# Altium PCB PCB1-C.PcbDoc (part 4 of 4)
Units mil, origin at the board's own origin, x right, y up, seen from the top; angles counter-clockwise.
Board outline 2476.38 x 3779.53 mil, 2 copper layers (Top Layer, Bottom Layer); 106 components, 105 nets, 404 pads, 256 vias.
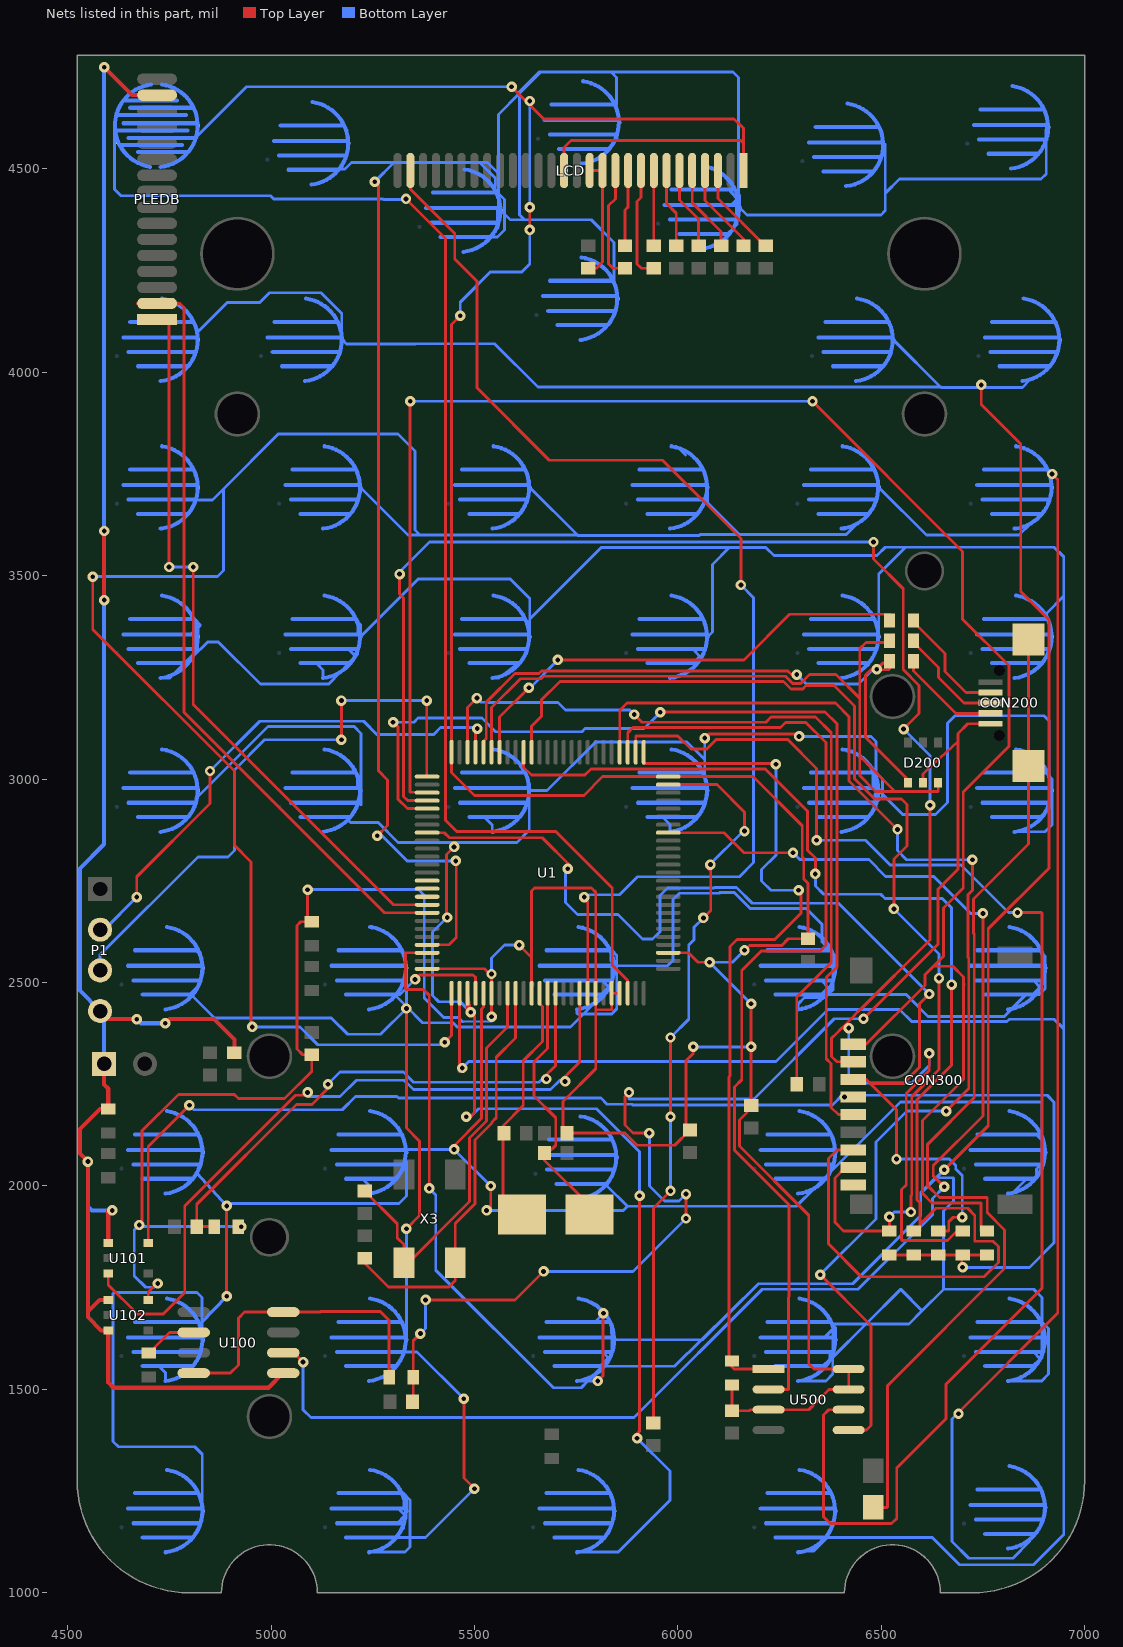
[diagram p4: the nets of this part, all layers, seen from the top]

## Via types
v1: diameter 25.59, hole 11.81, Top Layer to Bottom Layer, tented both sides, 253 vias
v2: diameter 39.37, hole 39.37, Top Layer to Bottom Layer, tented both sides, 2 vias
v3: diameter 25.59, hole 11.81, Top Layer to Bottom Layer, 1 vias

## Nets (pads, with @x,y where several pads share a name; then routed paths per layer and width w, separated by ;. In a path a pad name is that pad's centre, name@x,y a point inside that pad or via, vN(x,y) a via of type N, cw(c..) or ccw(c..) an arc to the next point about the centre after c; other vN are vias at no path point) (continued)
KO_0: KEY1.1 KEY2.1 KEY3.1 KEY4.1 KEY5.1 KEY6.1 KEY7.1 U1.97 | length 9341.4
  Top Layer w7: v1(5255,4468.5) 5264,4459.5 5264,3020.59 5286.59,2998 5286.59,2886.41 v1(5261.25,2861.06) ; U1.97@5383.74,2592.83 5437.5,2592.83 5455.34,2610.68 5455.34,2797.81 v1(5454,2799.16)
  Bottom Layer w7: 5160,4500 5167.9,4500 5182.01,4500 5198.01,4516 5302.5,4516 ; v1(5255,4468.5) 5302.5,4516 ; v1(5261.25,2861.06) 5272.97,2861.06 5334.87,2799.16 v1(5454,2799.16) ; 5381.04,4403.64 5556,4403.64 5557,4402.64 5557,4389.6 ; 5394.04,4367.64 5556,4367.64 5557,4368.64 ; 5398.04,4441.64 5540.36,4441.64 5551.04,4441.64 ; 5417.04,4332.64 5536.04,4332.64 ; 5557,4361.25 5557,4367.64 5557,4368.64 ; 5558.04,4367.64 5558.04,4364.09 5558.04,4354.64 5550.02,4346.62 5536.04,4332.64 ; 5668.44,4187.1 5837.5,4187.1 ; 5672.38,4620.17 5844,4620.17 ; 5681.44,4151.1 5837.5,4151.1 ; 5685.38,4584.17 5844,4584.17 ; 5685.44,4225.1 5838.44,4225.1 ; 5689.38,4658.17 5842.38,4658.17 ; 5704.44,4116.1 5823.44,4116.1 ; 5760.48,4079.72 5760.48,4080 5762.71,4080 ; 5827.38,4549.17 5841.36,4563.16 5850.38,4572.17 5850.38,4583.64 ; 5843,4225.1 5843,4319 ; 5843.47,4225.1 5843,4319 ; 5849.38,4658.17 5849.38,4725 5836.38,4738 ; 5967.65,4411.51 6131,4411.51 6144.65,4425.17 ; 5980.65,4375.51 6137.5,4375.51 6144.65,4375.51 ; 5984.65,4449.51 6125,4449.51 6144.65,4427.99 ; 6122.65,4340.51 6136.64,4354.5 6145.65,4363.51 6145.65,4374.98 6145.65,4375.51 ; 6137.65,4449.51 6142.71,4444.46 6144.65,4442.51 ; 6145.65,4411.51 6145.65,4375.51 ; 6321.98,4565.06 6489.94,4565.06 ; 6334.98,4529.06 6484.06,4529.06 ; 6338.98,4603.06 6491.98,4603.06 ; 6357.98,4494.06 6400,4494.06 6476.56,4494.06 ; 6504.53,4565.06 6510,4559.58 6510,4440 ; 6882.5,4537.36 6886.75,4537.36 ; 6897.5,4646.36 6900,4646.36 6900.59,4645.77 ; 6904.5,4572.36 6904.5,4595.36 6905.5,4596.36 6905.5,4602.87 ; 6905.5,4571.83 6905.5,4487.5 6893,4475 6545,4475 6510,4440 ; 6905.5,4608.36 6905.5,4602.87 ; KEY7.1@6911.5,4602.36 6910.2,4601.06 6908.75,4599.61 6905.5,4602.87 ; 5302.5,4516 5512.5,4516 ; 5512.5,4516 5551.04,4477.46 5551.04,4447.13 5551.04,4441.64 ; 5512.5,4516 5532,4516 5559.04,4488.96 ; 5536.04,4332.64 5540.3,4332.64 5556.64,4332.64 5574,4350 5574,4388.68 ; 5551.04,4441.64 5553.86,4441.64 5557.36,4441.64 5559.04,4439.96 ; 5557,4368.64 5557,4389.6 ; 5557,4389.6 5563.74,4396.34 KEY2.1@5565.04,4397.64 ; 5559.04,4403.64 5561,4403.64 5561,4401.68 ; 5559.04,4403.64 5559.04,4402.68 5560,4402.68 ; 5559.04,4403.64 5560,4402.68 ; 5559.04,4403.64 5559.04,4428.44 5559.04,4439.96 ; 5559.04,4439.96 5559.04,4488.96 ; 5559.04,4439.96 5574,4425 5574,4388.68 ; 5559.04,4488.96 5559.04,4634.04 5611,4686 ; 5560,4402.68 5561,4401.68 ; 5561,4401.68 KEY2.1@5563.68,4399 ; KEY2.1@5563.68,4399 5563.74,4399 5565.04,4399 KEY2.1@5565.04,4398.93 ; KEY2.1@5563.68,4399 KEY2.1@5563.75,4398.93 ; KEY2.1@5563.75,4398.93 KEY2.1@5565.04,4397.64 ; KEY2.1@5563.75,4398.93 KEY2.1@5565.04,4398.93 ; KEY2.1@5565.04,4397.64 5574,4388.68 ; KEY2.1@5565.04,4397.64 KEY2.1@5565.04,4398.93 ; 5574,4388.68 5587.35,4375.33 5623.31,4375.19 ; 5611,4686 5611,4387.5 5623.31,4375.19 ; 5611,4686 5611,4690 5659,4738 5663,4738 ; 5611,4686 5663,4738 ; 5623.31,4375.19 5673.74,4375 ; 5623.31,4375.19 5623.5,4375 5673.74,4375 ; 5663,4738 5836.38,4738 ; 5673.74,4375 5787,4375 5843,4319 ; 5836.38,4738 6136,4738 6149,4725 6149,4438.17 ; 6144.65,4375.51 6145.65,4375.51 ; 6144.65,4375.51 6144.65,4411.51 6144.65,4425.17 ; 6144.65,4425.17 6144.65,4427.99 ; 6144.65,4425.17 6146,4426.51 6144.65,4427.99 ; 6144.65,4427.99 6144.65,4439.33 6144.65,4442.51 ; 6144.65,4442.51 6149,4438.17 ; 6145.65,4375.51 6145.82,4375.51 6148,4375.51 6149,4376.51 6149,4389 6149,4422.3 6149,4438.17 ; 6149,4438.17 6151.65,4435.51 KEY5.1@6151.65,4405.51 6170.12,4387.05 6499.3,4387.05 6510,4397.74 6510,4440
KO_1: KEY8.1 KEY9.1 KEY10.1 KEY11.1 KEY12.1 KEY13.1 KEY14.1 U1.98 | length 12562.7
  Top Layer w7: U1.98@5383.74,2573.15 5332,2573.15 5331,2572.15 5331,2484 5332,2483 5375,2483 5389,2469 v1(5389,1994) ; v1(5803,1520.62) 5816,1533.62 5816.5,1686.5 v1(5817,1687) ; v1(6655,2040) 6763.01,2148.01 6763.01,2632.09 6912,2781.08 6912,3392 6843,3461 6843,3824 6746,3921 v1(6746,3969)
  Bottom Layer w7: 4821,4100.54 4892.46,4172 4972.3,4172 4996,4195.7 5123.3,4195.7 5174,4145 5174,4100 ; 4991.28,4086 5168.28,4086 ; 5083.32,3978.62 5093,3981 ; KEY9.1@5175.28,4080 5185.28,4070 5355.47,4070 5355.77,4070.3 5549.7,4070.3 5656,3964 6512.5,3964 6512.56,3964.06 6645.54,3964.06 ; v1(5389,1994) 5405,1978 5405,1793 5694,1504 5762.5,1504 5779.12,1520.62 ; 5660.5,1628 5827.5,1628 5837.5,1628 ; 5673.5,1592 5816,1592 5829,1577 5809,1557 5696.5,1557 ; 5677.5,1666 5796,1666 v1(5817,1687) ; 5752.55,1520.62 5779.12,1520.62 ; v1(5803,1520.62) 5779.12,1520.62 ; 5830.5,1666 5835.55,1660.95 ; 5837.5,1592 5837.5,1628 ; 6203.9,1628 6361,1628 6380.9,1647.9 ; 6216.9,1592 6366.5,1592 6373,1592 6374,1591 6374,1575 6356,1557 6275.5,1557 6239.9,1557 ; 6220.9,1666 6373.9,1666 ; 6295.95,1520.62 6364.12,1520.62 6381,1537.5 6381,1579.1 ; 6358.9,1557 6372.89,1570.99 6381,1579.1 ; 6380.9,1592 6380.9,1628 6380.9,1647.9 ; 6381.9,1628 6381,1628 6381,1588.74 6381,1579.1 ; KEY13.1@6387.9,1622 6387.9,1652 6381.05,1658.85 ; KEY10.1@6529.61,4080 6645.54,3964.06 ; 6646.61,3964.06 6645.54,3964.06 ; v1(6655,2040) 6635.3,2020.3 ; 6719.6,1628 6887.5,1628 6895,1628 ; 6732.6,1592 6875,1592 6890,1575 6872,1557 6755.6,1557 ; 6736.6,1666 6889.6,1666 ; v1(6746,3969) v1@6746,3963 ; 6755.06,4086 6925,4086 ; 6768.06,4050 6925.5,4050 ; 6772.06,4124 6925.06,4124 ; 6791.06,4015 6832.1,4015 6875,4015 ; 6811.64,1520.62 6811,1520.62 6811,1521 6814.6,1521 6894.5,1521 6911,1537.5 6911,1650 6895,1666 ; 6865.49,3982.44 6847,3963 v1@6746,3963 ; 6874.6,1557 6888.59,1570.99 6895,1577.4 6895,1584.18 6895,1592 6895,1628 ; 6896.6,1592 6896.6,1628 ; KEY14.1@6903.6,1622 6902.31,1623.29 6897.6,1628 ; 5779.12,1520.62 5792.2,1533.7 5815.5,1557 5819.76,1557 5992,1557 6058.12,1622 ; 5835.55,1660.95 5835.55,1661 5837,1661 5837,1659.5 ; 5835.55,1660.95 5837,1659.5 ; 5837,1659.5 5837.5,1659 5837.5,1655.82 5837.5,1637 ; 5837,1659.5 5837,1657.22 5837,1637.5 5837.5,1637 ; 5837.5,1628 5838.5,1628 5843.21,1623.29 KEY12.1@5844.5,1622 6058.12,1622 ; 5837.5,1628 5837.5,1637 ; 6058.12,1622 6060.5,1622 6198.2,1759.7 ; 6058.12,1622 6198.2,1759.7 ; 6198.2,1759.7 6429.82,1759.7 6597.3,1927.18 6597.3,1982.3 ; 6373.9,1666 6375,1666 6378.64,1661.7 6379.23,1661 ; 6373.9,1666 6378.95,1660.95 ; 6378.95,1660.95 6380.9,1659 ; 6378.95,1660.95 6378.95,1661 6379.23,1661 ; 6379.23,1661 6462.9,1661 ; 6379.23,1661 6381.05,1658.85 ; 6380.9,1647.9 6380.9,1655.82 6380.9,1659 ; 6380.9,1647.9 6382.8,1649.8 6386,1653 6381.05,1658.85 ; 6380.9,1659 6381.05,1658.85 ; 6381,1579.1 6462.9,1661 ; 6462.9,1661 6568,1661 6600.45,1693.45 ; 6462.9,1661 6547.9,1746 6600.45,1693.45 ; 6597.3,1982.3 6597.3,1983.59 6634,2020.3 6635.3,2020.3 ; 6597.3,1982.3 6635.3,2020.3 ; 6600.45,1693.45 6652.7,1745.7 ; 6635.3,2020.3 6676,2020.3 6677.3,2019 6677.3,1963.2 6652.7,1938.61 6652.7,1745.7 ; 6645.54,3964.06 6646.61,3963 v1@6746,3963 ; 6652.7,1745.7 6875,1746 6895,1726 6895,1666 ; 6889.6,1666 6894.65,1660.95 ; 6889.6,1666 6892.42,1666 6895,1666 ; 6894.65,1660.95 6894.65,1661 6895,1661 ; 6894.65,1660.95 6895,1660.6 ; 6895,1628 6896.6,1628 ; 6895,1628 6895,1660.09 6895,1660.6 ; 6895,1660.6 6895,1661 ; 6895,1660.6 6896.6,1659 6896.6,1655.82 6896.6,1628 ; 6895,1661 6895,1666 ; 6895,1661 6897.6,1661 6897.6,1652.81 6897.6,1628 ; 6896.6,1628 6897.6,1628
KO_2: KEY15.1 KEY16.1 KEY17.1 KEY18.1 KEY19.1 KEY20.1 KEY21.1 U1.1 | length 11604.8
  Top Layer w7: v1(4562,3497.72) 4562,3368 4910.2,3019.8 4910.2,2837.5 4951,2796.7 4951,2394 v1(4954,2391) ; v1(5427.23,2353.5) 5443.78,2370.05 U1.1@5443.78,2473.74 ; v1(6690,1440) 6690,1443.5 6934,1687.5 6934,3736.5 6933.5,3736.5 v1(6920,3750)
  Bottom Layer w7: v1(4562,3497.72) 4868.72,3497.72 4883.5,3512.5 4883.5,3713.5 ; 4637,3723 4811,3723 ; 4650,3687 4787.5,3687 ; 4654,3761 4800,3761 ; 4673,3652 4714.5,3652 4792,3652 ; 4729,3615.62 4729,3616 4732,3616 ; 4813.5,3686.5 4815.01,3686.5 4856.5,3686.5 4883.5,3713.5 ; v1(4954,2391) 5071,2391 5115,2347 5420.73,2347 v1(5427.23,2353.5) ; 5036,3723 5200,3723 ; 5049,3687 5194.5,3687 ; 5053,3761 5206,3761 ; 5072,3652 5191,3652 ; KEY16.1@5218,3719 5218.71,3718.29 KEY16.1@5220,3717 5337,3600 5366.5,3600 ; 5452,3723 5629,3723 ; 5465,3687 5612.5,3687 ; 5469,3761 5622,3761 ; 5488,3652 5587,3652 ; 5625,3761 5624.82,3761 5622,3761 ; 5627.05,3755.95 5622,3761 ; 5632.27,3720.73 5634.71,3718.29 KEY17.1@5636,3717 5753,3600 ; 5754,3600 5753,3600 ; 5889,3723 6050,3723 ; 5902,3687 6054,3687 ; 5906,3761 6059,3761 ; 5925,3652 6012.5,3652 ; 5984.18,3818.24 6003,3812.5 6018.5,3797 ; KEY18.1@6073,3717 6073,3680 6152,3601 ; 6310,3723 6475,3723 ; 6323,3687 6462.5,3687 ; 6327,3761 6457,3761 ; 6346,3652 6447,3652 ; 6402.04,3615.62 6407.07,3616.32 ; 6441.7,3628.7 6414,3601 6152,3601 ; KEY19.1@6494,3717 6611,3600 6839,3600 6867.7,3628.7 6874.5,3635.5 ; v1@6686.5,1440 6674,1427.5 6674,1126 6715,1085 6823.6,1085 6864.3,1125.7 ; 6736,3723 6900,3723 ; 6749,3687 6887.5,3687 ; 6753,3761 6906,3761 ; 4883.5,3713.5 5018,3848 5312.5,3848 5354,3806.5 5354,3612.5 5366.5,3600 ; 5366.5,3600 5753,3600 ; 5753,3600 5754,3599 6053.1,3599 6055.1,3601 6152,3601
KO_3: KEY22.1 KEY23.1 KEY24.1 KEY25.1 KEY26.1 KEY27.1 KEY28.1 U1.2 | length 11750.9
  Top Layer w7: v1@5463.46,2281.54 U1.2@5463.46,2473.74
  Bottom Layer w7: 4637,3356 4803.5,3356 4814,3366.5 ; 4654,3394 4807,3394 ; 4729.05,3248.62 4751,3248.62 4759.25,3256.87 4787.38,3285 4810.82,3308.44 4820,3317.62 4820,3356 4819.54,3356 4815,3356 ; 4792,3285 4805.99,3298.99 4844.5,3337.5 4870.5,3337.5 4974,3234 5142,3234 5170.54,3263.4 5204.85,3298.76 5208,3302 ; 4814,3320 4814,3356 4814,3366.5 ; KEY22.1@4821,3350 4821,3373.5 ; 5049,3320 5190,3320 5207.12,3302.88 5208,3302 ; 5072,3285 5072,3284 5112.5,3284 5128,3268.5 5128,3248.62 ; 5191,3285 5204.99,3298.99 5208,3302 ; 5206,3394 5211.05,3388.95 5214,3386 ; 5209.53,3392.47 5214,3388 5214,3386 ; 5213,3320 5213,3316.45 5213,3307 5208,3302 ; 5214,3356 5214,3380.81 5214,3386 ; 5452,3356 5626,3356 ; v1@5462.5,2282.5 v1(5470,2290) 5486,2306 6241,2306 6369,2434 6545,2434 6575,2404 6809,2404 6815,2410 6925,2410 6948.5,2386.5 ; 5465,3320 5612.5,3320 ; 5469,3394 5616,3394 ; 5488,3285 5590,3285 ; 5544.05,3248.62 5560,3248.62 5567.22,3254.03 5608.5,3285 ; KEY24.1@5636,3350 5636,3394 ; 5889,3356 6054,3356 ; 5902,3320 6037.5,3320 6054,3301.5 6037.5,3285 5965,3285 5925,3285 ; 5906,3394 6059,3394 ; KEY25.1@6073,3350 6085,3362 6085,3528 6126,3569 ; 6203.9,1207 6362.5,1207 ; 6216.9,1171 6370.5,1171 ; 6220.9,1245 6373.9,1245 ; 6239.9,1136 6358.9,1136 ; 6295.94,1099.62 6295.94,1102 6309.14,1102 6333.9,1102 6367.9,1136 ; 6310,3356 6475,3356 ; 6323,3320 6471,3320 6472,3319 ; 6327,3394 6480,3394 ; 6346,3285 6457,3285 ; 6370,1136 6625.5,1136 6692.5,1069 6874,1069 6948.5,1143.5 6948.5,2386.5 ; 6402.04,3248.62 6415,3252 ; KEY26.1@6494,3350 6494,3504 6560,3570 ; 6736,3356 6900,3356 ; 6749,3320 6900,3320 ; 6906,3399.49 6906,3407.5 6948.5,3450 ; 4807,3394 4809.82,3394 4812.5,3394 4826,3378.5 4821,3373.5 ; 4807,3394 4812.05,3388.95 4814,3387 ; 4814,3366.5 4814,3383.82 4814,3387 ; 4814,3366.5 4817.72,3370.22 4821,3373.5 ; 4814,3387 4821,3380 4821,3373.5 ; 5214,3386 5220,3380 KEY23.1@5220,3350 5362,3492 5588,3492 5636,3444 5636,3394 ; 5636,3394 5811,3569 6126,3569 ; 6126,3569 6217,3569 6236,3550 6490,3550 6510,3570 6925,3570 6948.5,3546.5 6948.5,2386.5
KO_4: KEY29.1 KEY30.1 KEY31.1 KEY32.1 KEY33.1 KEY34.1 KEY35.1 U1.3 | length 10099.2
  Top Layer w7: v1(5433,2660) 5431.7,2661.3 5431.7,2815.2 v1(5450,2833.5) ; v1@5485,2165 5500,2180 5500,2417.15 5483.15,2434 U1.3@5483.15,2473.74 v1(5491,2427) ; v1(5900,1380) 5900,1391 5906,1397 v1(5906,1976) ; v1(6066,3101) 6076,3111 6292,3111 v1(6298,3105)
  Bottom Layer w7: 4650,2942 4795,2942 ; 4654,3016 4807,3016 ; 4673,2907 4785,2907 ; 4815,2952 4818.32,2955.32 4992.2,3129.2 5204.62,3129.2 5221.32,3112.5 5221.32,2937.32 ; 5036,2978 5203.5,2978 ; 5049,2942 5192,2942 ; 5053,3016 5205,3016 5211.72,3009.28 5213,3008 ; 5072,2907 5187,2907 ; 5188.89,2900 5195.26,2893.63 5263.57,2893.63 5312.5,2844.7 5604.7,2844.7 5634.71,2874.71 5634.71,2970.97 KEY31.1@5634.71,2973.29 ; 5206,3016 5211.05,3010.95 5213,3009 5213,3008 ; 5213,2978 5213,3005.82 5213,3008 ; 5221,2937 5221,3000 5213,3008 ; v1(5433,2660) 5397,2624 5397,2468.5 5412.5,2453 5465,2453 v1(5491,2427) ; 5452,2978 5624,2978 ; 5465,2942 5624,2942 ; 5469,3016 5612.5,3016 ; v1@5485,2165 5510,2190 5800,2190 5906,2084 v1(5906,1976) ; 5488,2907 5488,2906 5525.5,2906 5544,2887.5 5544,2870.62 ; 5634.54,2978 5640.54,2972 5678.49,2972 5798.19,3091.7 6022.3,3091.7 6066,3048 ; 5660.5,1207 5825,1207 ; 5673.5,1171 5812.5,1171 ; 5677.5,1245 5804.5,1245 ; 5696.5,1136 5815.5,1136 ; 5752.54,1099.62 5752,1099.62 5752,1100 5755.5,1100 5851.5,1100 ; 5853.5,1100 5981,1227.5 5981,1299 v1(5900,1380) ; 5889,2978 6066,2978 ; 5902,2942 6051.5,2942 ; 5906,3016 6056,3016 ; 5925,2907 5962.5,2907 5981,2888.5 5981,2870.62 ; 6044,2907 6057.99,2920.99 ; 6066,3014 6066,3048 ; v1(6066,3101) 6066,3048 ; v1(6298,3105) 6475,3105 6487.5,3092.5 6487.5,3016 ; 6323,2942 6466,2942 6472.5,2942 6485,2942 ; 6327,3016 6469,3016 6480,3016 ; 6465,2907 6478.99,2920.99 6487.5,2929.5 6487.5,2939.92 6487.5,2942 ; 6485,2933.19 6485,2942 ; KEY33.1@6492.71,2972 KEY33.1@6494,2972 ; 6736,2978 6903.5,2978 6913,2978 ; 6749,2942 6898.5,2942 6908,2942 6909,2941 6909,2928.66 6909,2925 ; 6753,3016 6903.49,3016 6912.63,3006.86 6913,3006.49 ; 6772,2907 6891,2907 6904.99,2920.99 6909,2925 ; 6828.05,2870.62 6902.61,2870.62 6919.49,2887.5 KEY34.1@6919.49,2972.51 ; 6906,3016 6911.05,3010.95 6913,3009 ; KEY34.1@6920,2972 KEY34.1@6919.49,2972.51 ; 6480,3016 6482.82,3016 6487.5,3016 ; 6480,3016 6480,2986 6487.5,2978.5 ; 6485,2942 6487,2942 ; 6485,2942 6485,2963 6487,2965 ; 6487,2942 6487.5,2942 ; 6487,2942 6487,2965 ; 6487,2965 6487,2969 6487.5,2969.5 ; 6487,2965 6487.5,2965.5 ; 6487.5,2942 6488.46,2942.96 6503,2957.5 6503,2963 ; 6487.5,2942 6487.5,2965.5 ; 6487.5,2965.5 6492.7,2970.7 KEY33.1@6494,2972 ; 6487.5,2965.5 6487.5,2969.5 ; 6487.5,2969.5 6487.5,2978 6487.5,2978.5 ; 6487.5,2969.5 6488,2970 6488,2978 ; 6487.5,2978.5 6487.5,3004.35 6487.5,3016 ; 6487.5,2978.5 6488,2978 ; 6487.5,3016 6503,3000.5 6503,2963 ; 6488,2978 6492.71,2973.29 KEY33.1@6494,2972 ; KEY33.1@6494,2972 6503,2963 ; 6503,2963 6553,2913 6633,2913 6663,2943 6663,3137.5 6681.5,3156 6900,3156 6913,3143 6913,3009 ; 6909,2925 6913,2929 6913,2938.45 6913,2942 6913,2978 ; 6913,2978 6913,3005.82 6913,3006.49 ; 6913,2978 6914,2978 6918.71,2973.29 KEY34.1@6919.49,2972.51 ; 6913,3006.49 6913,3009 ; 6913,3006.49 6919.49,3000 KEY34.1@6919.49,2972.51
  other v1: 5480,2170
KO_5: KEY36.1 KEY37.1 KEY38.1 KEY39.1 KEY40.1 KEY41.1 KEY42.1 U1.4 | length 9246.6
  Top Layer w7: v1(5332.7,1894.74) 5365.4,1927.44 5365.4,2110 5332.7,2142.7 v1(5332.7,2436.2) ; v1(5354.23,2507.9) 5365.33,2519 5496.83,2519 5502.83,2513 U1.4@5502.83,2473.74 ; v1(5474,1477) 5474,1282 v1(5500,1256)
  Bottom Layer w7: 4648.7,2541.4 4814.6,2541.4 4825.7,2541.4 ; 4661.7,2505.4 4803.1,2505.4 ; 4665.7,2579.4 4815.1,2579.4 4824,2570.5 ; 4684.7,2470.4 4799.9,2470.4 4818,2488.5 ; 4740,2434.02 4740.74,2434.02 ; 4803.7,2470.4 4806,2468.1 4860.8,2413.3 5148.23,2413.3 5188.53,2373 5269.5,2373 v1(5332.7,2436.2) v1@5332.7,2441.4 ; 4818.7,2579.4 4823.75,2574.35 ; 5148.7,1207 5312.5,1207 5329,1190.5 5311.5,1171 5161.7,1171 ; 5148.7,1628 5315.5,1628 ; 5161.7,1592 5310.5,1592 ; 5165.7,1245 5318.7,1245 ; 5165.7,1666 5315,1666 ; 5165.7,2579.4 5300,2579.4 ; 5184.7,1136 5303.7,1136 ; 5184.7,2470.4 5225,2470.4 ; 5240.74,1099.62 5240,1099.62 5240,1100 5243.7,1100 5329.5,1100 5342,1112.5 5342,1136 ; 5240.74,2434.02 5241,2434.02 ; 5243.88,2636.64 5243.88,2636 5247.8,2636 ; 5313,2592.4 5313,2594.04 ; 5325.7,1171 5325.7,1167.45 5325.7,1158 5317.69,1149.99 5303.7,1136 ; 5325.7,2505.4 5327.37,2507.07 5331,2510.7 5331,2526.37 5331,2537.1 5326.7,2541.4 ; 5326.7,1207 5326.7,1231.81 5326.7,1237 ; 5326.87,1592 5359,1592 v1(5474,1477) ; KEY42.1@5332.7,1201 5332.7,1231 5326.7,1237 ; KEY41.1@5332.7,1622 v1(5332.7,1894.74) ; KEY37.1@5332.7,2535.4 5332.7,2486.37 ; v1(5354.23,2507.9) 5332.7,2486.37 ; v1(5500,1256) 5380,1136 5342,1136 ; 5660.5,2541.4 5826.6,2541.4 5837.5,2541.4 ; 5673.5,2505.4 5815.1,2505.4 5830,2488.5 5811.9,2470.4 5696.5,2470.4 ; 5677.5,2579.4 5830.5,2579.4 ; 5752.54,2434.02 5752,2434.02 5752,2424 5753,2423 5768.1,2423 ; 5815.5,2470.4 5792.2,2447.1 5768.1,2423 ; 5837.5,2505.4 5837.5,2541.4 ; KEY38.1@5844.5,2535.4 5843.21,2536.69 5838.5,2541.4 ; 6216.9,2505.4 6353.1,2505.4 6369,2487.5 6351.9,2470.4 6275.6,2470.4 6239.9,2470.4 ; 6295.94,2434.02 6296,2434.02 ; 6296,2434.03 6296,2448 6311.4,2463.4 6356.79,2463.4 6362.5,2463.4 6369.5,2470.4 ; 6358.9,2470.4 6363.16,2470.4 6369.5,2470.4 ; 6380.9,2505.4 6380.9,2541.4 6380.9,2569.22 6380.9,2572.4 ; 6381.9,2541.4 6381.9,2504.87 6381.9,2482.8 6369.5,2470.4 ; KEY39.1@6387.9,2535.4 6387.9,2565.4 6380.9,2572.4 ; 6719.6,2541.4 6887.5,2541.4 6896.6,2541.4 ; 6732.6,2505.4 6875,2505.4 6890,2488.4 6872,2470.4 ; 6736.6,2579.4 6887.5,2579.4 6895.99,2570.91 6896.6,2570.3 ; 6755.6,2470.4 6855.78,2470.4 ; 6811.64,2434.02 6822,2437 6855,2470 6855.38,2470 ; 6874.6,2470.4 6872,2470.4 ; 6889.6,2579.4 6894.65,2574.35 6896.6,2572.4 6896.6,2570.3 ; 6896.6,2505.4 6896.6,2541.4 ; KEY40.1@6903.6,2535.4 KEY40.1@6903,2536 ; 5303.7,1136 5307.96,1136 5342,1136 ; 5318.7,1245 5323.75,1239.95 5326.7,1237 ; 5318.7,1245 5321.52,1245 5325,1245 5342,1228 5342,1136 ; v1@5332.7,2441.4 5372.8,2401.3 5447.3,2401.3 5457.74,2390.85 5735.95,2390.85 5768.1,2423 ; v1@5332.7,2441.4 5306,2468.1 5303.7,2470.4 5307.96,2470.4 5316.73,2470.4 5332.7,2486.37 ; v1@5332.7,2441.4 5332.7,2486.37 ; 5768.1,2423 5837.5,2423 5850,2435.5 5850,2541.4 ; 5830.5,2579.4 5835.55,2574.35 ; 5830.5,2579.4 5833.32,2579.4 5837.5,2579.4 5850,2566.9 5850,2541.4 ; 5835.55,2574.35 5835.9,2574 ; 5835.55,2574.35 5835.55,2574 5835.69,2574 5835.9,2574 ; 5835.9,2574 5836,2573.9 ; 5835.9,2574 5836,2574 5836,2573.9 ; 5836,2573.9 5836,2573.24 5836,2552.9 5837.5,2551.4 ; 5836,2573.9 5837.5,2572.4 5837.5,2569.22 5837.5,2551.4 ; 5837.5,2541.4 5837.5,2551.4 ; 5837.5,2541.4 5838.5,2541.4 ; 5837.5,2551.4 5838.5,2550.4 5838.5,2541.4 ; 5838.5,2541.4 5843.04,2541.4 5850,2541.4 ; 5850,2541.4 5975,2541.4 5988,2554.4 5988,2703.8 6003.82,2719.61 6101.71,2719.61 6103.09,2721 6138.59,2721 6177.89,2681.7 6315.62,2681.7 6354,2643.32 6354,2610.37 6354,2599.3 6373.9,2579.4 6378.95,2574.35 6380.9,2572.4 ; 6369.5,2470.4 6561.6,2470.4 6615,2417 6802.38,2417 6820.88,2435.5 6855.38,2470 ; 6855.38,2470 6878.52,2470 6887.5,2470 6903,2485.5 KEY40.1@6903,2536 ; 6855.38,2470 6855.78,2470.4 ; 6855.78,2470.4 6872,2470.4 ; 6896.6,2541.4 6896.6,2569.22 6896.6,2570.3 ; 6896.6,2541.4 6897.6,2541.4 6902.31,2536.69 KEY40.1@6903,2536 ; 6896.6,2570.3 6903,2563.9 KEY40.1@6903,2536
KO_6: KEY43.1 KEY44.1 KEY45.1 KEY46.1 KEY47.1 KEY48.1 KEY49.1 U1.5 | length 7576.2
  Top Layer w7: v1(4891,1729) v1(4891,1951) ; v1(5450,2090) 5450,2098.47 5517,2165.47 5517,2434 5522.52,2439.52 U1.5@5522.52,2473.74 ; v1(5530,1940) 5540,1940 v1(5540,2000)
  Bottom Layer w7: 4648.7,1207 4809.5,1207 ; 4648.7,1628 4812.5,1628 ; 4648.7,2088.7 4810.3,2088.7 ; 4661.7,1171 4814.5,1171 ; 4661.7,1592 4812.5,1592 ; 4661.7,2052.7 4812.5,2052.7 ; 4665.7,1245 4800,1245 ; 4665.7,1666 4812.5,1666 ; 4665.7,2126.7 4784.7,2126.7 4816.8,2126.7 4824.98,2118.52 4826.7,2116.8 ; 4684.7,1557 4725,1557 4741,1541 4741,1520.65 ; 4684.7,2017.7 4722.3,2017.7 4729,2017.7 4803.7,2017.7 4807.96,2017.7 ; 4740.74,1099.62 4741,1099.62 ; 4740.74,1520.62 4741,1520.62 ; 4817.5,2031.5 4817.55,2031.45 v1(4891,1951) ; 4818.7,2126.7 4823.75,2121.65 4826.7,2118.7 4826.7,2116.8 ; 4825.7,2049.15 4825.7,2052.7 ; 4826.7,2113.51 4826.7,2116.8 ; 4828.95,1644.45 4830,1645.5 4830,1665 ; 4831,1210.31 4831,1340.5 4812.5,1359 4625,1359 4612,1372 4612,1736 4614,1738 4818,1738 4830,1726 4830,1665 ; v1(4891,1729) 4830,1665 ; v1@4896,1957 5314.7,1957 5332.7,1975 5332.7,2059.7 ; 5148.7,2088.7 5321,2088.7 ; 5161.7,2052.7 5321,2052.7 ; 5165.7,2126.7 5307.8,2126.7 ; 5184.7,2017.7 5225,2017.7 5240.74,2001.96 5240.74,1981.32 ; 5303.7,2017.7 5317.69,2031.69 5326.7,2040.7 5326.7,2052.17 ; 5331.24,2088.7 5332.54,2090 v1(5450,2090) v1(5540,2000) ; KEY44.1@5331.41,2083.99 KEY44.1@5332.7,2082.7 ; v1(5530,1940) 5866,1940 5876,1950 ; 5821,2005 5823.3,2002.7 5876,1950 ; 6203.9,2088.7 6362.5,2088.7 ; 6216.9,2052.7 6353.8,2052.7 ; 6220.9,2126.7 6364.8,2126.7 ; 6295.94,1981 6295.94,1981.32 ; 6736.6,2126.7 6880.8,2126.7 6894.5,2113 ; 6811.64,1981.32 6824,1984 6857,2017 6874.5,2017.7 6874.6,2017.7 ; 6889.6,2126.7 6894.5,2121.8 ; 6896.6,2052.7 6896.6,2088.7 6896.6,2114.5 ; 6897.6,2088.7 6897.6,2113.5 6896.6,2114.5 ; 5876,1950 6291.2,1950 6335.6,1994.4 6358.9,2017.7 6372.89,2031.69 6547.5,2206.3 6893.2,2206.3 6894.5,2205 6894.5,2122.02 6894.5,2121.8 ; 6874.6,2017.7 6882,2025.1 ; 6874.6,2017.7 6879,2017.88 6882,2018 6882,2021.7 6882,2025.1 ; 6882,2025.1 6882,2042 6892.7,2052.7 6894.5,2054.5 ; 6882,2025.1 6888.59,2031.69 6894.5,2037.6 6894.5,2043.65 6894.5,2052.7 6894.5,2054.5 ; 6894.5,2054.5 6895,2055 6895,2088.7 6895,2112.5 6894.5,2113 ; 6894.5,2054.5 6894.5,2088.7 6894.5,2113 ; 6894.5,2113 6894.5,2121.8 ; 6894.5,2121.8 6894.65,2121.65 ; 6894.65,2121.65 6894.65,2122 6895,2122 6895,2121.3 ; 6894.65,2121.65 6895,2121.3 ; 6895,2121.3 6896.6,2119.7 6896.6,2116.52 6896.6,2114.5 ; 6895,2121.3 6895,2120.79 6895,2116.1 6896.6,2114.5
LCD_RST: LCD.27 U1.18 | length 2915.2
  Top Layer w7: LCD.27@5342.52,4496.06 5342.52,4450 5451.5,4341.02 5451.5,4278.5 5506,4224 5506,3962 5684,3784 5962.5,3784 6155,3591.5 v1(6155,3477.3) ; v1@5760,2716 5778.43,2697.57 U1.18@5778.43,2473.74
  Bottom Layer w7: v1(5770,2710) 5776,2716 5857,2716 5901,2760 6151.38,2760 6186.3,2794.92 6186.3,3446 v1(6155,3477.3)
NetC12_1: C12.1 U1.49 | length 1818.1
  Top Layer w7: C12.1@5940,1417.56 5940,1946 v1(5982,1988) ; U1.49@5976.26,2986.54 6096,2986.54 6164,2918.54 v1(6164,2872.27) ; v1(5982,2170) v1(5982,2365) ; v1(6063,2659) 6081,2677 6081,2774.5 v1@6072,2783.5
  Bottom Layer w7: v1(5982,1988) v1(5982,2170) ; v1(5982,2365) 6027,2410 6027,2592.12 6040,2605.12 6040,2636 v1(6063,2659) ; v1@6072,2783.5 v1@6162.38,2873.88
  other v1: 6080,2790
NetC13_1: C13.1 U1.73 | length 1958.2
  Top Layer w7: U1.73@5483.15,3066.26 5483.15,3176.35 v1(5506.05,3199.25) ; v1(5893,3159) 5912.2,3139.8 6216.36,3139.8 6228.92,3152.36 6338.64,3152.36 6377,3114 6377,2549 6292.44,2464.44 C13.1@6292.44,2250
  Bottom Layer w7: v1(5506.05,3199.25) 5516.3,3189 5534.68,3189 5535.38,3188.3 5705.23,3188.3 5723.53,3170 5882,3170 v1(5893,3159)
NetC400_2: C400.2 LCD.3 | length 235.2
  Top Layer w7: LCD.3@6098.43,4496.06 6098.43,4427 6214.4,4311.02 C400.2@6216.54,4311.02
NetC401_2: C401.2 LCD.4 | length 224.2
  Top Layer w7: LCD.4@6066.93,4496.06 6066.93,4422 6161.42,4327.51 C401.2@6161.42,4311.02
NetC402_2: C402.2 LCD.5 | length 214.4
  Top Layer w7: LCD.5@6035.43,4496.06 6035.43,4417 6106.3,4346.13 C402.2@6106.3,4311.02
NetC403_2: C403.2 LCD.6 | length 204.6
  Top Layer w7: LCD.6@6003.94,4496.06 6003.94,4424 6051.18,4376.76 C403.2@6051.18,4311.02
NetC404_2: C404.2 LCD.7 | length 194.8
  Top Layer w7: LCD.7@5972.44,4496.06 5972.44,4414.62 5996.06,4391 C404.2@5996.06,4311.02
NetC405_1: C405.1 LCD.9 | length 278.8
  Top Layer w7: LCD.9@5909.45,4496.06 5909.45,4429.45 5900,4420 5900,4266.45 5910.54,4255.91 C405.1@5940.94,4255.91
NetC405_2: C405.2 LCD.8 | length 185
  Top Layer w7: C405.2@5940.94,4311.02 LCD.8@5940.94,4496.06
NetC406_1: C406.1 LCD.11 | length 280.6
  Top Layer w7: LCD.11@5846.46,4496.06 5846.46,4426.46 5830,4410 5830,4266.91 5841,4255.91 C406.1@5870.08,4255.91
NetC406_2: C406.2 LCD.10 | length 188.3
  Top Layer w7: C406.2@5870.08,4311.02 5870.08,4399 5877.95,4406.87 LCD.10@5877.95,4496.06
NetC407_2: C407.2 LCD.12 LCD.13 | length 298.3
  Top Layer w7: C407.2@5779.53,4255.91 5800,4255.91 5814.96,4270.87 LCD.12@5814.96,4496.06 LCD.13@5783.46,4496.06
NetC410_2: 
NetCON200_2: CON200.2 R200.2 | length 256.6
  Top Layer w7: R200.2@6579.53,3290 6579.53,3265.56 6683.36,3161.73 CON200.2@6768.7,3161.73
NetCON200_3: CON200.3 R201.2 | length 269.2
  Top Layer w7: R201.2@6579.53,3340 6579.53,3336 6641.13,3274.4 6641.13,3249.75 6703.56,3187.32 CON200.3@6768.7,3187.32
NetCON200_4: CON200.4 R202.2 | length 290.7
  Top Layer w7: R202.2@6579.53,3390 6579.53,3386 6656.39,3309.14 6656.39,3265 6708.48,3212.91 CON200.4@6768.7,3212.91
NetCON200_8: CON200.8 CON200.9 L200.1 | length 2537.5
  Top Layer w7: L200.1@6480,1210 6514,1210 6515,1211 6515,1508.97 6803.22,1797.19 6803.22,1891.78 6760.61,1934.39 6760.61,1970 6759.31,1971.3 6643.2,1971.3 6614.14,2000.36 6614.14,2102.76 6728.69,2217.31 6728.69,2618.72 6726.59,2620.82 6726.59,2705.3 6862.2,2840.91 CON200.8@6862.2,3031.81 CON200.9@6862.2,3342.83
NetQ400_2: 
NetR102_1: R102.1 U100.4 U100.8 | length 759.1
  Top Layer w7: U100.4@4810,1540 4900,1540 4920,1560 4920,1675 4935,1690 U100.8@5030,1690 5121,1690 5122.3,1691.3 5268.7,1691.3 5290.47,1669.53 R102.1@5290.47,1530
NetR103_2: R103.2 U100.2 | length 134.9
  Top Layer w7: R103.2@4704,1589.53 R103.2@4700,1589.53 4750.47,1640 U100.2@4810,1640
OSC32_IN: C17.1 U1.8 X3.4 | length 1037.9
  Top Layer w7: C17.1@5230,1987.56 5310.4,1907.15 5310.4,1872.44 5327.01,1855.84 X3.4@5327.01,1811.73 5327.01,1781 5328,1781 X3.4@5328,1800.39 ; X3.4@5332.64,1806.1 5473.23,1946.7 5488.08,1961.55 5488.08,2118.17 5530,2160.09 5530,2338.96 5581.57,2390.53 U1.8@5581.57,2473.74
OSC32_OUT: C18.1 U1.9 X3.1 | length 1033.2
  Top Layer w7: C18.1@5230,1822.44 5230,1811 5289.17,1751.83 5437.5,1751.83 5452.99,1767.32 X3.1@5452.99,1811.73 5452.99,1908.08 5501.08,1956.17 5501.08,2112.78 5543,2154.7 5543,2157.22 5553.56,2167.78 5553.56,2316.35 5601.26,2364.05 U1.9@5601.26,2473.74
OSC_IN: C15.1 U1.12 X1.2 | length 606.3
  Top Layer w7: X1.2@5617.32,1930 5570,1977.32 5570,2147.56 5620,2197.56 5620,2307.8 5667,2354.8 5667,2440.75 5660.31,2447.44 U1.12@5660.31,2473.74
OSC_OUT: C16.1 U1.13 X1.1 | length 641.7
  Top Layer w7: U1.13@5680,2473.74 5680,2338 5646.7,2304.7 5646.7,2220.96 5700,2167.66 5700,2100 5681,2081 C16.1@5672.44,2081 5672.44,2062.79 5782.68,1952.55 X1.1@5782.68,1930
PH_ENABLE: U1.17 U101.3 | length 1783.4
  Top Layer w7: U101.3@4600,1785.2 4600,1757 4672,1685 4735,1685 4788,1738 4788,1950.8 5060.2,2223 v1@5090,2223 ; v1@5714,2260 5758.74,2304.74 U1.17@5758.74,2473.74
  Bottom Layer w7: v1@5090,2220 5170,2220 5210,2260 5327.09,2260 5350.09,2237 5687,2237 5710,2260
  other v1: 5090,2230 5723,2257
RST: C14.2 R1.1 U1.14 | length 1331.4
  Top Layer w7: R1.1@4860.47,1900 C14.2@4817.56,1900 4817.56,1955.06 5063.01,2200.51 5100.51,2200.51 v1@5144,2244 ; v1@5669,2265 5699.68,2295.68 U1.14@5699.68,2473.74
  Bottom Layer w7: v1@5132.95,2242.95 5170,2280 5325.47,2280 5350.47,2255 5659,2255 v1@5669,2265
  other v1: 5140,2250 5677,2263
SD-DET#: CON300.9
SDIO_CK: CON300.5 U1.80 | length 2437.9
  Top Layer w7: v1(5300,3140) 5312.59,3127.41 5312.59,2950 5335.11,2927.48 U1.80@5383.74,2927.48 ; v1(5957,3164.5) 5957.86,3165.36 6362.14,3165.36 6391.3,3136.2 6391.3,2538.46 6365,2512.16 6365,2312.89 6376.92,2300.98 6376.92,2193.08 6394.65,2175.35 CON300.5@6431.18,2175.35
  Bottom Layer w7: v1(5300,3140) 5351.5,3140 5361.5,3150 5518.53,3150 5552.05,3116.48 5764.05,3116.48 5772.19,3124.62 5917.12,3124.62 v1(5957,3164.5)
SDIO_CMD: CON300.3 R301.1 U1.83 | length 2583.5
  Top Layer w7: U1.83@5383.74,2868.43 5426,2868.43 5438.63,2855.8 5666.7,2855.8 v1@5736,2786.5 ; CON300.3@6431.18,2261.97 6463,2261.97 6472.85,2252.12 ; v1(6537.5,2066) 6537.5,2187.47 6472.85,2252.12 ; v1(6618,2472) 6594,2448 6594,2291.82 6554.3,2252.12 6472.85,2252.12 ; R301.1@6640,1889.53 6665,1889.53 6666,1890.53 6666,1912 6677,1923 v1(6699,1923)
  Bottom Layer w7: v1@5736,2786.5 5723.5,2774 5723.5,2696.5 5753,2667 5853,2667 5913,2607 5938,2607 5956,2625 5956,2713.61 5975,2732.61 6088.71,2732.61 6090.09,2734 6144,2734 6183,2695 6395,2695 v1(6618,2472) ; v1(6537.5,2066) 6667,2066 6683,2050 6683,2042 6699,2026 v1(6699,1923)
  other v1: 5729.5,2780
SDIO_D0: CON300.8 R304.1 U1.65 | length 2781.8
  Top Layer w7: U1.65@5640.63,3066.26 5640.63,3130 5665.2,3154.57 5665.2,3195 5710.2,3240 6259.59,3240 6277.88,3221.7 6307.12,3221.7 6315.41,3230 6383.77,3230 6434.05,3179.72 6434.05,3000.95 6484,2951 6550,2951 6563,2938 6563,2836 6531,2804 v1(6531,2681) ; CON300.8@6431.18,2045.43 6411.62,2045.43 6386,2019.81 6386,1911 6407.47,1889.53 R304.1@6520,1889.53 v1(6520,1924) ; v1(6573,1936) 6573,1976.19 6575.14,1978.33 6575.14,2219.36 6642,2286.23 v1(6642,2511)
  Bottom Layer w7: v1(6520,1924) 6532,1936 v1(6573,1936) ; v1(6531,2681) 6642,2570 v1(6642,2511)
SDIO_D1: CON300.7 R300.1 U1.66 | length 3258.5
  Top Layer w7: U1.66@5620.94,3066.26 5620.94,3029.06 5640,3010 5771.16,3010 5786.16,3025 6215,3025 6318.7,2921.3 6318.7,2825.2 6338,2805.9 v1(6338,2767) ; CON300.7@6431.18,2088.74 6390.93,2088.74 6370,2067.81 6370,1858 6451,1777 6753,1777 6788,1812 6788,1851 6775,1864 6731,1864 6730,1865 6730,1927.8 6712.5,1945.3 6634.8,1945.3 6595.3,1905.8 ; R300.1@6580,1889.53 6595.3,1889.53 6595.3,1905.8 ; v1(6673,2495) 6673,2296.65 6588.14,2211.79 6588.14,1965.86 6595.3,1958.7 6595.3,1905.8
  Bottom Layer w7: v1(6338,2767) 6338,2737.5 6358.5,2717 6499,2717 6509,2707 6650,2707 6673,2684 v1(6673,2495)
SDIO_D2: CON300.1 R303.1 U1.78 | length 4844.4
  Top Layer w7: v1(5342.05,3929) 5342.05,2968.8 U1.78@5383.74,2966.85 ; v1(6331,3929) 6700,3560 6700,3393 6814,3279 6814,3081 6701.68,2968.68 6701.68,2732.27 6652.7,2683.3 6652.7,2564.59 6628.27,2540.15 ; CON300.1@6431.18,2348.58 6463,2348.58 6607.2,2492.79 6607.2,2519.09 6628.27,2540.15 ; R303.1@6760,1889.53 6745,1889.53 6745,1958.18 6744.89,1958.3 6625,1958.3 6601.14,1982.16 6601.14,2160.55 6702.3,2261.71 6702.3,2513.7 6675.85,2540.15 6628.27,2540.15
  Bottom Layer w7: v1(5342.05,3929) v1(6331,3929)
SDIO_D3: CON300.2 R302.1 U1.79 | length 4419.8
  Top Layer w7: v1(5316,3504) 5316,3455 5325.59,3445.41 5325.59,2957.7 5336.13,2947.17 U1.79@5383.74,2947.17 ; 6390,2306.28 CON300.2@6431.18,2305.28 6391,2305.28 6378,2318.28 6378,2363 6390,2375 ; v1(6420,2388) 6403,2388 6390,2375 ; v1(6481,3583) 6481,3541 6554,3468 6554,3269.41 6593.16,3230.24 6593.16,3161.16 v1(6555,3123) ; v1(6618,2326) 6618,2283.5 6561.5,2227 6561.5,2002.5 6550,1991 6550,1867 6551,1866 6662.47,1866 6686,1889.53 R302.1@6700,1889.53 ; v1(6620,2936) 6620,2605 6448.3,2433.3 6447.13,2433.3 6434.07,2420.24 6434.07,2419.07 6390,2375
  Bottom Layer w7: v1@5313.5,3506.5 5390,3583 v1(6481,3583) ; v1(6420,2388) 6420,2270.5 6437.5,2253 6575,2253 6618,2296 v1(6618,2326) ; v1(6555,3123) 6620,3058 v1(6620,2936)
SPI2_MISO: U1.53 U500.2 | length 2438.3
  Top Layer w7: U1.53@5876.85,3066.26 5876.85,3114.12 5889.52,3126.8 6252.53,3126.8 6265.03,3139.3 6314.59,3139.3 6364,3089.89 6364,2592 6350,2578 6205,2578 6157,2530 6157,2261 6139,2243 6139,2088 6273,1954 6272,1500 U500.2@6223.15,1500
SPI2_MOSI: U1.54 U500.5 | length 2975.6
  Top Layer w7: U1.54@5857.17,3066.26 5857.17,3169.17 5875,3187 6387.5,3187 6421.05,3153.45 6421.05,2995.56 v1(6540,2876.61) ; v1(6350,1782) 6475,1657 6475,1411 6464,1400 U500.5@6420,1400 ; v1(6660,2184) 6715.3,2239.3 6715.3,2560 6713,2562.3 6713,2716 6724,2727 v1(6724,2802)
  Bottom Layer w7: v1(6350,1782) 6487,1919 6487,2108 6563,2184 v1(6660,2184) ; v1(6540,2876.61) 6540,2824.5 6562.5,2802 v1(6724,2802)
SPI2_NSS: R500.1 U1.51 U500.1 | length 2154.4
  Top Layer w7: U1.51@5916.22,3066.26 5916.22,3038.7 6238.8,3038.7 v1(6241,3036.5) ; U500.1@6223.15,1550 6187.53,1550 6138.5,1550 6126,1562.5 6126,2267.7 6128.38,2270.08 6128.38,2588.68 6145.7,2606 6238.39,2606 6302.7,2670.32 6302.7,2726 6301.7,2727 v1(6297,2727)
  Bottom Layer w7: v1(6241,3036.5) 6241,2812.85 6205.85,2777.7 6205.85,2750 6228.85,2727 v1(6297,2727)
SPI2_SCK: U1.52 U500.6 | length 3486.3
  Top Layer w7: U1.52@5896.54,3066.26 5896.54,3105 5897.81,3106.27 6000,3106.27 6032.27,3074 6071,3074 6094.3,3097.3 6270.08,3097.3 6341,3026.37 v1(6341,2850) ; U500.6@6420,1450 6371,1450 6358,1437 6358,1187 6375,1170 6525,1170 6538,1183 6538,1307 6659,1428 6659,1512.5 6895,1748.5 6895,2671 6894,2672 v1(6835,2672)
  Bottom Layer w7: v1(6341,2850) 6461,2850 6522,2789 6696,2789 6813,2672 v1(6835,2672)
SPI3_MISO: U1.90
SPI3_MOSI: U1.91
SPI3_SCK: U1.89
STDBY: U1.43 U100.6 | length 3607.3
  Top Layer w7: U100.6@5030,1590 5056,1590 v1(5079,1567) ; U1.43@5976.26,2868.43 6113.19,2868.43 6162.61,2819 v1(6283,2819) ; v1(6655,1998) 6628,2025 6628,2050 6750,2172 v1(6750,2670)
  Bottom Layer w7: v1(5079,1567) 5079,1450 5098,1431 5892.62,1431 6207.62,1746 6443,1746 6626,1929 6626,1969 v1(6655,1998) ; v1(6283,2819) 6299.7,2802.3 6469.59,2802.3 6510.89,2761 6629,2761 6720,2670 v1(6750,2670)
SWCLK: P1.3 U1.76 | length 1459.8
  Top Layer w7: v1(5173,3097) v1(5173,3193) ; v1(5383,3193) 5383,3006.22 U1.76@5383.74,3006.22
  Bottom Layer w7: P1.3@4580,2530 4580,2568.38 4820.62,2809 4894.2,2809 4910.2,2825 4910.2,3022.91 4984.3,3097 v1(5173,3097) ; v1(5173,3193) v1(5383,3193)
SWDIO: P1.2 U1.72 | length 1294.1
  Top Layer w7: v1(4670,2710) 4670,2760 4850,2940 v1(4850,3020) ; U1.72@5502.83,3066.26 5502.83,3124.17 v1(5506.91,3124.17)
  Bottom Layer w7: P1.2@4580,2630 4590,2630 v1(4670,2710) ; v1(4850,3020) 4972.2,3142.2 5227.8,3142.2 5260,3110 5400,3110 5417,3127 v1@5500,3127 ; v1(5506.91,3124.17) v1@5510.37,3124.17
TFT_BL: PLEDB.2 U1.93 | length 1915.7
  Top Layer w7: PLEDB.2@4671.3,4169.37 PLEDB.2@4720,4169.37 4776.63,4169.37 4786.37,4159.63 4786.37,3164.6 5279.4,2671.57 U1.93@5383.74,2671.57
TFT_CS: 
TFT_D0: 
TFT_D1: 
TFT_D2: 
TFT_D3: 
TFT_D4: 
TFT_D5: 
TFT_D6: 
TFT_D7: 
TFT_EN: 
TFT_ENABLE: PLEDB.1 U1.92 | length 1784.6
  Top Layer w7: v1(4749.47,3521.5) PLEDB.1@4749.47,4130 ; v1(4809,3521.5) 4809,3183.53 5301.27,2691.26 U1.92@5383.74,2691.26
  Bottom Layer w7: v1(4749.47,3521.5) v1(4809,3521.5)
TFT_PWM: 
TFT_RD: 
TFT_RS: 
TFT_WR: 
TGND: 
TVCC: 
USB_DM: D200.4 R200.1 U1.71 | length 1575
  Top Layer w7: U1.71@5522.52,3066.26 5522.52,3093.32 5529.2,3100 5529.2,3189 5600,3259.8 5658.53,3259.8 5664.73,3266 6270.35,3266 6279.35,3257 v1(6292.5,3257) ; v1(6489,3270) 6505,3286 R200.1@6520.47,3286 ; R200.1@6520.47,3290 R200.1@6520.47,3286 ; D200.4@6565.2,2991.58 6565.2,2999.02 6461.22,3103 6461.22,3255.22 6475,3269 6518.47,3269 6520.47,3271 R200.1@6520.47,3286
  Bottom Layer w7: v1(6292.5,3257) 6315.5,3234 6444,3234 6480,3270 v1(6489,3270)
USB_DP: D200.6 R201.1 U1.70 | length 1835.8
  Top Layer w7: U1.70@5542.2,3066.26 5542.2,3176 5613,3246.8 5663.91,3246.8 5670.12,3253 6264.97,3253 6283.27,3234.7 6301.73,3234.7 6324.03,3257 6389,3257 6447.05,3198.95 ; R201.1@6520.47,3340 6520.47,3336 6462.5,3336 6447.05,3320.55 6447.05,3198.95 ; D200.6@6640,2991.58 6640,2971 6639,2970 6533.99,2970 ; 6447.05,3056.94 6447.05,3198.95 ; 6447.05,3056.94 6447.05,3008.95 6486,2970 6533.99,2970 ; 6447.05,3056.94 6533.99,2970
USB_ID: R202.1 U1.69 | length 1168.6
  Top Layer w7: U1.69@5561.89,3066.26 5561.89,3152.39 v1(5634,3224.5) ; v1(5705,3293) 6162.29,3293 6274.78,3405.49 6520.47,3405.49 R202.1@6520.47,3390
  Bottom Layer w7: v1(5634,3224.5) 5634,3222 v1(5705,3293)
VBAT: BAT.1 C101.2 P1.4 PLEDB.15 R105.2 U100.5 U101.1 U102.1 U102.3 | length 4698
  Top Layer w10: 4550,1691 4579,1720 U102.1@4600,1720 ; P1.4@4580,2430 4600,2410 v1(4670,2410) ; BAT.1@4590,2300 4590,2249 4600,2239 R105.2@4600,2189.53 4579.53,2189.53 4530,2140 4530,2080 v1(4550,2060) 4550,1677.5 4582.3,1645.2 U102.3@4600,1645.2 4600,1516.5 4612.5,1504 4994,1504 U100.5@5030,1540 ; v1(4590,3440) v1(4590,3610) ; v1(4590,4750) 4658.82,4681.18 PLEDB.15@4720,4681.18 ; U101.1@4600,1860 4600,1940 v1(4610,1940) ; v1(4740,2400) 4750,2410 4860,2410 4910,2360 C101.2@4910,2327.56
  Bottom Layer w10: v1(4550,2060) 4550,1950 4560,1940 v1(4610,1940) ; P1.4@4580,2430 4530,2480 4530,2780 4590,2840 v1(4590,3440) ; BAT.1@4590,2300 P1.4@4590,2430 ; v1(4590,3610) v1(4590,4750) ; v1(4670,2410) 4680,2400 v1(4740,2400)
VBL: 
VBUS: C100.2 CON200.1 D200.5 R102.2 | length 3140.8
  Top Layer w7: C100.2@5347.56,1470 5349.53,1471.97 R102.2@5349.53,1530 5349.53,1619.53 v1(5367.26,1637.26) ; v1(5380,1720) 5600,1720 v1(5670,1790) ; v1(5880,2230) 5870,2220 5870,2150 5890,2130 v1(5930,2130) ; v1(6020,1920) v1(6020,1980) ; v1(6456.37,2411) 6639.7,2594.34 6639.7,2729.5 6688.68,2778.48 6688.68,3092.28 ; D200.5@6602.6,2991.58 6602.6,3012.5 6615.1,3025 6688.68,3092.28 ; CON200.1@6768.7,3136.14 6712.5,3136.14 6688.68,3112.32 6688.68,3092.28
  Bottom Layer w7: v1(5367.26,1637.26) 5380,1650 v1(5380,1720) ; v1(5670,1790) 5890,1790 v1(6020,1920) ; v1(5880,2230) 5880,2214 6187.5,2214 6384.5,2411 v1(6456.37,2411) ; v1(5930,2130) 5930,2000 5967,1963 6003,1963 v1(6020,1980)
VDD: C8.1 C9.1 C10.1 C11.1 C19.1 C500.1 KON.1 LCD.1 LCD.15 R1.2 R6.2 R500.2 U1.6 U1.11 U1.19 U1.21 U1.22 U1.28 U1.50 U1.75 U1.100 U102.5 U500.3 U500.7 U500.8 | length 11835.1
  Top Layer w7: v1(4676,1904) 4679,1904 4683,1908 4683,2135.76 4772.24,2225 4909.77,2225 4920.07,2214.7 5033.2,2214.7 5100,2281.5 C10.1@5100,2322.44 5078,2322.44 5064,2336.44 5064,2640.53 5073,2649.53 R6.2@5090,2649.53 ; U102.5@4698.43,1720 4698.43,1739.43 4719.3,1760.3 v1(4721.76,1760.3) ; R1.2@4919.53,1900 v1(4927,1900) ; v1(5090,2728.36) R6.2@5090,2649.53 ; R6.2@5100,2649.53 R6.2@5090,2649.53 ; U1.100@5383.74,2533.78 5525,2533.78 5542.2,2516.58 U1.6@5542.2,2473.74 v1(5542.2,2416) ; v1(5465,4139) 5443.78,4117.78 U1.75@5443.78,3066.26 5443.78,3016.22 5500,2960 5768.98,2960 5815.2,3006.22 U1.50@5976.26,3006.22 6184.78,3006.22 6305.7,2885.3 6305.7,2808.5 6309.4,2804.8 6309.4,2754.6 6320,2744 C9.1@6320,2607.56 6271.56,2607.56 6255.45,2591.45 6175.95,2591.45 v1(6164,2579.5) ; v1(5591.5,4702) 5670.5,4623 6138.42,4623 6161.42,4600 6161.42,4563.08 ; v1(5610,2592) 5640.63,2561.37 ; v1(5636,4350) v1(5636,4406) ; U1.11@5640.63,2473.74 5640.63,2561.37 ; LCD.15@5720.47,4496.06 5720.47,4552.94 5737.5,4569.97 6154.53,4569.97 6161.42,4563.08 ; U1.22@5857.17,2473.74 U1.21@5837.48,2473.74 5837.48,2434 5836.48,2433 5799.11,2433 5798.11,2434 ; U1.28@5976.26,2573.15 6026.65,2573.15 6049.8,2550 v1(6078,2550) ; v1(6038,2342) 6038,2325.92 6020,2307.92 6020,2147.56 C11.1@6030,2137.56 5992.44,2100 5900,2100 5870,2130 C19.1@5727.56,2130 5717.56,2130 5717.56,2207.56 5798.11,2288.11 5798.11,2434 ; R500.2@6133.15,1510.47 C500.1@6133.15,1447.56 6176,1447.56 6178.44,1450 U500.3@6223.15,1450 6322,1450 6372,1500 U500.7@6420,1500 U500.8@6420,1550 6334.5,1550 6322,1562.5 6322,1928.08 6152,2098.08 6152,2162.5 6168.5,2179 C8.1@6180,2197.56 v1(6180,2342) v1(6180,2448) ; LCD.1@6161.42,4496.06 6161.42,4563.08 ; 5640.63,2561.37 5640.63,2725 5647.93,2732.3 5787.7,2732.3 5798.11,2721.89 U1.19@5798.11,2473.74 5798.11,2434
  Bottom Layer w7: v1(4721.76,1760.3) 4712.46,1751 4692,1751 4664,1779 4664,1892 v1(4676,1904) 4680,1900 v1(4927,1900) ; 4815.67,4577.97 4939.7,4702 v1(5591.5,4702) ; v1(5090,2728.36) 5362.5,2728.36 5376.64,2714.23 5376.64,2462.36 5424.7,2414.3 5460.3,2414.3 5470.74,2403.85 5542.2,2405 v1(5542.2,2416) v1@5543.2,2415 ; v1(5465,4139) 5465,4172.3 5539,4246.3 5616.3,4246.3 5636,4266 v1(5636,4350) ; v1(5542,2521) 5542,2560 5574,2592 v1(5610,2592) ; v1(5636,4406) v1(5636,4667) ; v1(6038,2342) v1(6180,2342) ; v1(6164,2579.5) 6134.5,2550 v1(6078,2550) v1(6180,2448)
VPH: CON300.4 R300.2 R301.2 R302.2 R303.2 R304.2 U101.5 | length 3448
  Top Layer w7: U101.5@4698.43,1860 4698.43,2097.43 v1(4799.54,2198.54) ; v1@6399.66,2218.66 CON300.4@6431.18,2218.66 ; R304.2@6520,1830.47 R300.2@6580,1830.47 R301.2@6640,1830.47 R302.2@6698,1830.47 ; v1(6700,1800) 6698,1802 R302.2@6698,1830.47 ; R303.2@6760,1830.47 R302.2@6700,1830.47 R302.2@6698,1830.47
  Bottom Layer w7: v1(4799.54,2198.54) 4810.58,2187.51 5175.03,2187.51 5207.53,2220 5310,2220 5314,2216 5810.77,2216 5825.77,2201 5887.38,2201 5889.38,2199 6380,2199 6404,2223 6908,2223 6925,2206 6925,1860.5 6864.5,1800 v1(6700,1800)
  other v1: 6410,2218.66
VTFT: 
WKUP: KON.2 U1.23 | length 3210.6
  Top Layer w7: v1(5331.8,4426.2) 5429,4329 5429,2898.91 5456.7,2871.21 5699.88,2871.21 5838.7,2732.39 5838.7,2543.48 5876.85,2505.33 U1.23@5876.85,2473.74
  Bottom Layer w7: 4615.3,4612.17 4615.3,4450 4631.3,4434 4998.91,4434 5006.7,4426.2 5275.39,4426.2 5277.06,4424.53 5330.12,4424.53 v1(5331.8,4426.2)
pads on no net: CON200.6 CON200.7 CON300.0 D200.1 D200.3 U1.7 U1.15 U1.16 U1.33 U1.34 U1.36 U1.44 U1.45 U1.46 U1.47 U1.48 U1.55 U1.56 U1.57 U1.59 U1.60 U1.63 U1.64 U1.67 U1.68 U1.77 U1.84 U1.87 U101.4 U102.4 X3.2 X3.3
copper on no net:
  other v2: 6844.57,2065.12 6844.57,2380.08

## Other copper
Top Layer:
  text "Entry" at 5271.65,1326.77 h62.99
  text "ArithMax" at 4629.92,1204.72 h275.59
  text "Designed by Zweb" at 4629.92,1141.73 h39.37
  text "V3" at 5334.65,1110.24 h118.11

## Silkscreen, mask and mechanical layers (free items; w line width, h text height)
Top Paste:
  text "Entry" at 5271.65,1326.77 h62.99
  text "ArithMax" at 4629.92,1204.72 h275.59
  text "Designed by Zweb" at 4629.92,1141.73 h39.37
  text "V3" at 5334.65,1110.24 h118.11
Top Solder:
  text "Entry" at 5271.65,1326.77 h62.99
  text "ArithMax" at 4629.92,1204.72 h275.59
  text "Designed by Zweb" at 4629.92,1141.73 h39.37
  text "V3" at 5334.65,1110.24 h118.11
Mechanical 1:
  the board outline again, w0